# Altium PCB TSAL_Light.PcbDoc
Units mm, origin at the board's own origin, x right, y up, seen from the top; angles counter-clockwise.
Board outline 80.13 x 25.45 mm, 2 copper layers (Top Layer, Bottom Layer), stack 1.571 mm thick; 19 components, 16 nets, 54 pads, 59 vias.
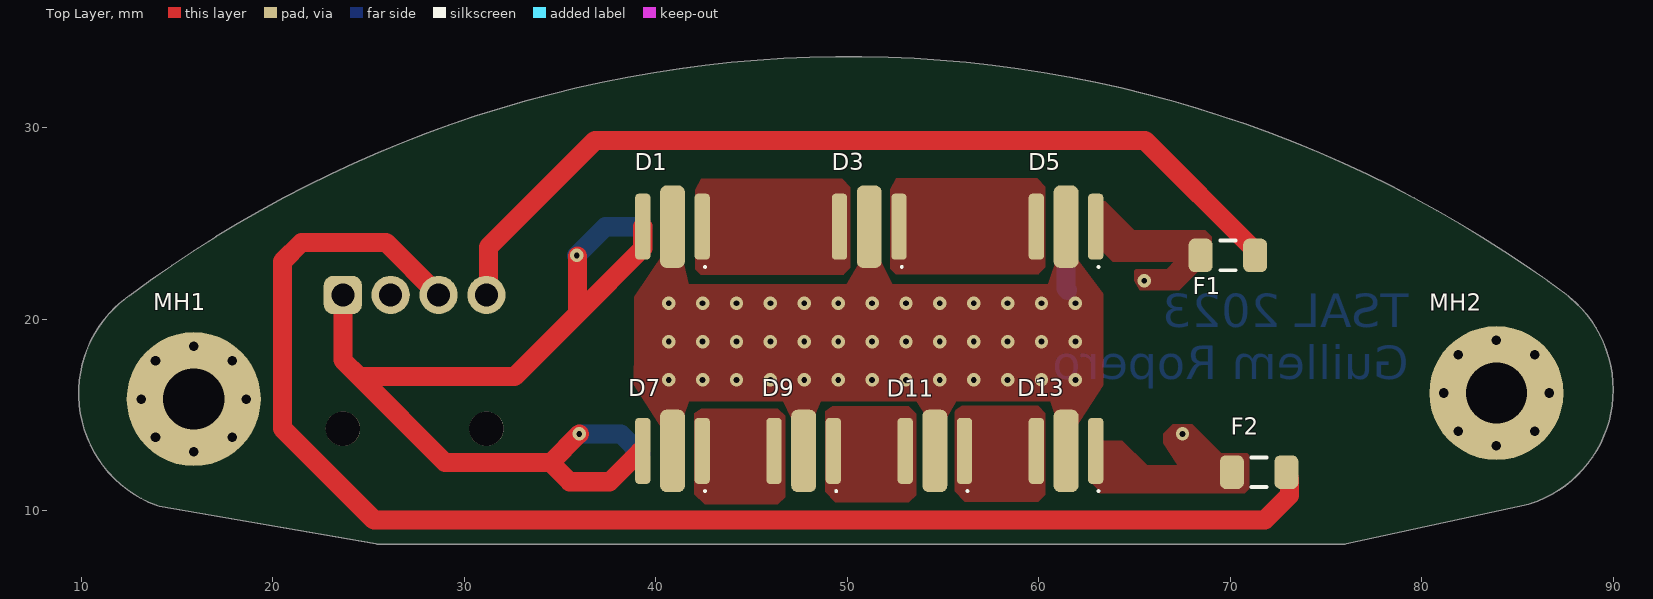
[diagram p0: Top Layer view]
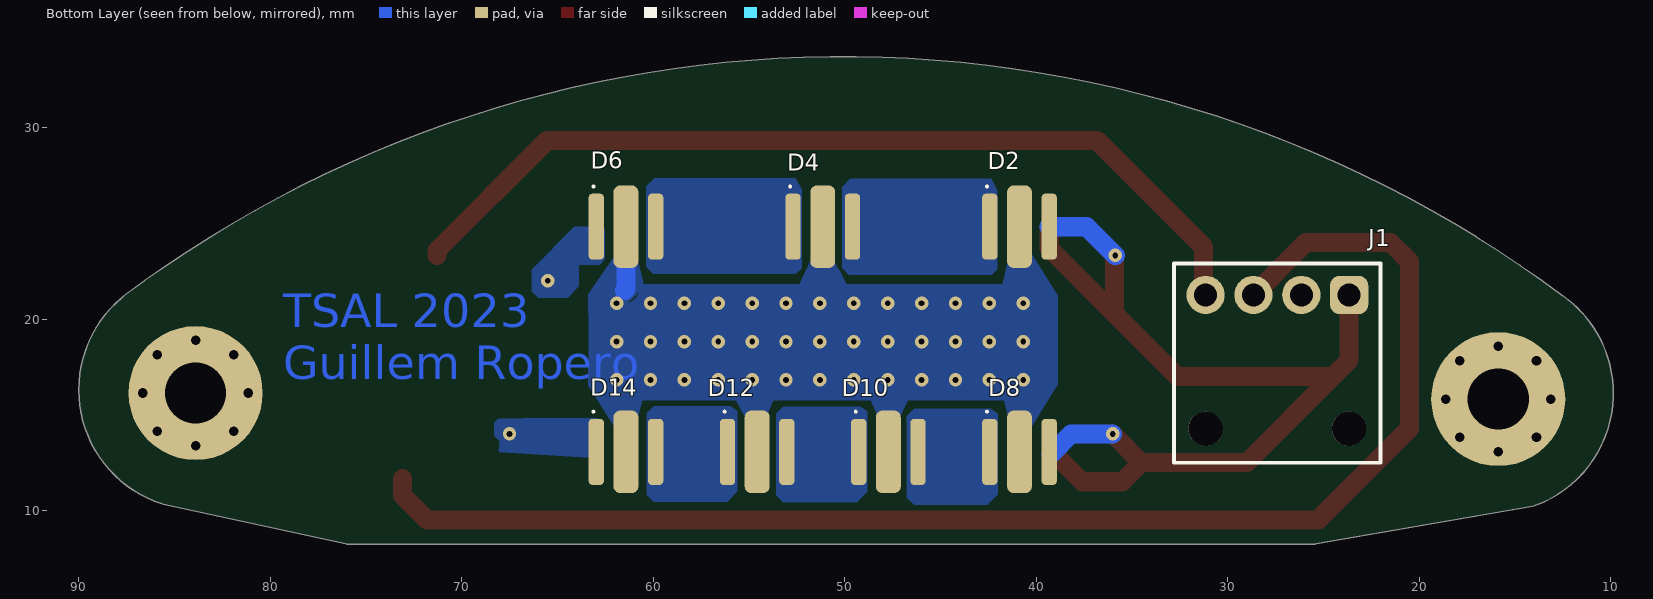
[diagram p1: Bottom Layer view, seen from below]

## Layer stack, top to bottom
Top Solder: solder mask 0.0102, Solder Resist, Dk 3.5
Top Layer: signal copper 0.0356
Dielectric 1: dielectric 1.5, FR-4, Dk 4.8
Bottom Layer: signal copper 0.0356
Bottom Solder: solder mask 0.0102, Solder Resist, Dk 3.5

## Board outline
14.068,10.222 25.383,8.253 25.426,8.25 76,8.25 76.053,8.255 85.582,10.326 85.652,10.353 ccw(c83.742,16.305) 89.992,16.305 ccw(c83.742,16.305) 87.713,21.131 87.65,21.201 ccw(c50.069,-29.052) 12.501,21.21 12.433,21.175 ccw(c16.106,16.118)

## Design rules (kind name [scope] priority, off if disabled: settings)
Clearance [All] p1: gap=0.2 ignorepadtopadclearanceinfootprint=FALSE
HoleSize [All] p1: absolutevalues=TRUE maxlimit=5 minlimit=0.15 maxpercent=80.000 minpercent=20.000
PlaneClearance [All] p1: clearance=0.5
PlaneConnect [All] p1: planeconnectstyle=Relief reliefexpansion=0.2 reliefentries=4 reliefconductorwidth=0.2 reliefairgap=0.5
PolygonConnect [All] p1: connectstyle=Direct reliefconductorwidth=0.2 reliefentries=4 polygonreliefangle="45 Angle" airgapwidth=0.5
RoomDefinition TSAL_Light [InComponentClass('TSAL_Light')] p1: confinementstyle=ConfineIn formatcopy=TRUE lockcomponents=FALSE outline 0,0 106,0 106,38.32 0,38.32
RoutingCorners [All] p1: cornerstyle=45-Degree minsetback=2.5 maxsetback=2.5
RoutingVias [All] p1: holewidth=0.3 width=0.7 viastyle="Through Hole" minholewidth=0.2 minwidth=0.5 maxholewidth=5 maxwidth=8
SilkToSolderMaskClearance [IsPad] p1: minsilkscreentomaskgap=0.25 clearancetoexposedcopper=TRUE
SolderMaskExpansion [All] p1: expansion=0.102 istentingtop=TRUE
UnRoutedNet [All] p1: checkbadconnections=TRUE
Width [All] p1: maxlimit=5 minlimit=0.2 preferedwidth=1
24 further rules are at their usual default settings.

## Components (designator, comment, footprint, x,y, rotation, side; value= is the part's Value field where it differs from the comment)
D1 "150353GS74500" LED_3535_WE 40.866,24.82 r180 top
D2 "150353GS74500" LED_3535_WE 40.866,24.82 r180 bottom
D3 "150353GS74500" LED_3535_WE 51.141,24.82 r180 top
D4 "150353GS74500" LED_3535_WE 51.141,24.82 r180 bottom
D5 "150353GS74500" LED_3535_WE 61.416,24.82 r180 top
D6 "150353GS74500" LED_3535_WE 61.416,24.82 r180 bottom
D7 "150353RS74500" LED_3535_WE 40.866,13.113 r180 top
D8 "150353RS74500" LED_3535_WE 40.866,13.063 r180 bottom
D9 "150353RS74500" LED_3535_WE 47.716,13.113 r180 top
D10 "150353RS74500" LED_3535_WE 47.716,13.063 r180 bottom
D11 "150353RS74500" LED_3535_WE 54.566,13.113 r180 top
D12 "150353RS74500" LED_3535_WE 54.566,13.063 r180 bottom
D13 "150353RS74500" LED_3535_WE 61.416,13.113 r180 top
D14 "150353RS74500" LED_3535_WE 61.416,13.063 r180 bottom
F1 "0437001.WRA" Fuse_1206 69.866,23.32 r180 top
F2 "0437001.WRA" Fuse_1206 71.5,12 r180 top
J1 "1053131204" J_NanoFit_1x4 27.4,17.763 r180 bottom
MH1 "Mounting_Hole_M3" Mounting_Hole_M3 15.866,15.82 r0 top
MH2 "Mounting_Hole_M3" Mounting_Hole_M3 83.89,16.135 r0 top

## Footprints (in the part's own frame and the unit in brackets; to place one, negate y for a bottom-side part, rotate by r counter-clockwise, add the part's x,y. Pads: shape width x height; smd on the part's side, far side on the other; paste and mask are expansions set on the pad)
Fuse_1206 [mm] "Chip Resistor, 2-Leads, Body 3,20x1,58mm, IPC Medium Density"
  rrect50% 1.25x1.75 smd: 1(-1.425,0) 2(1.425,0)
  silkscreen extent -0.4,-0.77 0.4,0.77, body extent -1.6,-0.79 1.6,0.79, height 0.86
J_NanoFit_1x4 [mm]
  rrect50% 2x2 hole 1.2: 1(3.75,3.492)
  round 2 hole 1.2: 2(1.25,3.492) 3(-1.25,3.492) 4(-3.75,3.493)
  round 1.8 hole 1.8: 5(-3.75,-3.492) 5(3.743,-3.493)
  silkscreen extent -5.4,-5.27 5.39,5.14, body extent -5.47,-8.35 5.47,3.81, height 6.35
LED_3535_WE [mm] "DFN, 2-Leads, Body 3,25x3,25mm, Pitch 2,28mm, IPC Medium Density"
  rrect50% 0.8x3.45 smd: A(1.55,0) K(-1.55,0)
  rrect50% 1.3x4.3 smd: T(0,0)
  silkscreen extent -1.75,2.05 -1.65,2.15, body extent -1.73,-1.73 1.73,1.73, height 0.25
Mounting_Hole_M3 [mm]
  round 7 hole 3.2: 1(0,0)

## Part data
D1 D2 D3 D4 D5 D6: library part LEDGS-3535-85, "High Brightness LED, WL-SMDC Series, 525 nm, Green, 85 lm, 350 mA", Case/Package=SMD/SMT, Color=Green, Forward Current=1A, Forward Voltage=3.4V, Manufacturer="Wurth Electronics", Supplier Part Number 1=732-10350-1-ND, Test Current=350mA, Test Temperature=25°C, Thermal Resistance of Package=8°C/W, .Creator=GP, ComponentLink1Description=http://www.farnell.com/datasheets/1886832.pdf?src-supplier=Farnell, ComponentLink1URL=http://www.farnell.com/datasheets/1886832.pdf?src-supplier=Farnell, ComponentLink2Description=http://www.farnell.com/datasheets/1886832.pdf?src-supplier=Element14, ComponentLink2URL=http://www.farnell.com/datasheets/1886832.pdf?src-supplier=Element14, ComponentLink3Description="Where buy it", ComponentLink3URL=https://www.we-online.com/catalog/en/WL-SMDC?sq=150353rs74500&sp=https%3A%2F%2Fwww.we-online.com%2Fweb%2Fen%2Fwuerth_elektronik%2Fsearchpage.php%3Fsearch%3D150353rs74500#150353GS74500, Luminous Flux=85lm, Manufacturer part number=150353GS74500, Max Current Rating=1A, Mount="Surface Mount", Packaging="Cut Tape", Pricing 1="1=3,24000, 50=2,85700, 100=2,34700, 500=2,08000 (USD)", REACH SVHC=Unknown, RoHS=Yes, RoHS Compliant=Yes, Supplier 1=Digi-Key, Viewing Angle=125°, Wavelength=525nm
D7 D8 D9 D10 D11 D12 D13 D14: library part LEDRS-3535-55, "High Brightness Led, Wl-Smdc Series, 625 Nm, Red, 55 Lm, 350 Ma", Case/Package=SMD/SMT, Color=Red, Forward Current=700mA, Forward Voltage=2.2V, Manufacturer="Wurth Electronics", Supplier Part Number 1=9008911, Test Current=350mA, Test Temperature=25°C, Thermal Resistance of Package=10°C/W, .Creator=GP, ComponentLink1Description=http://www.farnell.com/datasheets/1886833.pdf?src-supplier=Farnell, ComponentLink1URL=http://www.farnell.com/datasheets/1886833.pdf?src-supplier=Farnell, ComponentLink2Description=http://www.farnell.com/datasheets/1886833.pdf?src-supplier=Element14, ComponentLink2URL=http://www.farnell.com/datasheets/1886833.pdf?src-supplier=Element14, ComponentLink3Description="Where buy it", ComponentLink3URL=https://www.we-online.com/catalog/en/WL-SMDC?sq=150353rs74500&sp=https%3A%2F%2Fwww.we-online.com%2Fweb%2Fen%2Fwuerth_elektronik%2Fsearchpage.php%3Fsearch%3D150353rs74500#150353RS74500, Luminous Flux=55lm, Manufacturer part number=150353RS74500, Max Current Rating=700mA, Mount="Surface Mount", Packaging="Cut Tape", Pricing 1="5=1,40500 (USD)", REACH SVHC=Unknown, RoHS=Yes, RoHS Compliant=Yes, Stock 1=1, Supplier 1=RSComponents, Viewing Angle=125°, Wavelength=625nm
F1 F2: library part Fuse_1A_63V_1206, "Fuse Chip Fast Acting 1A 63V SMD Solder Pad 1206 Ceramic T/R Automotive", Case Code (Imperial)=1206, Case Code (Metric)=3216, Current Rating=1A, Manufacturer=Littelfuse, Max Operating Temperature=150°C, Min Operating Temperature=-55°C, Supplier Part Number 1=F10001CT-ND, Voltage Rating (AC)=63V, .Creator=DO, Approvals=CSA,cURus, Case/Package=1206, Category=Fuses, ComponentLink1Description=https://www.littelfuse.com/~/media/electronics/datasheets/fuses/littelfuse_fuse_437a_datasheet.pdf.pdf?src-supplier=Digi-Key, ComponentLink1URL=https://www.littelfuse.com/~/media/electronics/datasheets/fuses/littelfuse_fuse_437a_datasheet.pdf.pdf?src-supplier=Digi-Key, ComponentLink2Description="Where buy it", ComponentLink2URL=https://www.mouser.es/ProductDetail/Littelfuse/0437001WRA?qs=DXv0QSHKF4z9CJhPXjxR%252BA%3D%3D, Fuse Type="Board Mount (Cartridge Style Excluded)", Manufacturer part number=0437001.WRA, Mount="Surface Mount", Packaging="Tape and Reel", Pricing 1="1=1,52000, 5=1,47000, 10=1,37600, 50=1,13860, 100=0,94880, 250=0,92508, 500=0,78276, 1000=0,68788 (USD)", RoHS=Yes, Stock 1=5820, Supplier 1=Digi-Key, Voltage Rating (DC)=63V
J1: library part J_NanoFit_1x4, "Nano-Fit Right Angle Header; Through Hole; 2.50mm; Single Row; 4 Circuit; Gold Plated", Color=Black, Manufacturer=Molex, Manufacturer part number=105313-1204, Supplier Part Number 1=1225085, .Creator=DO, Category="Headers and Wire Housings", ComponentLink1Description=http://www.farnell.com/datasheets/2216599.pdf?src-supplier=Farnell, ComponentLink1URL=http://www.farnell.com/datasheets/2216599.pdf?src-supplier=Farnell, ComponentLink2Description=http://www.farnell.com/datasheets/2216599.pdf?src-supplier=Element14, ComponentLink2URL=http://www.farnell.com/datasheets/2216599.pdf?src-supplier=Element14, ComponentLink3Description=http://www.farnell.com/datasheets/2216599.pdf?src-supplier=Newark, ComponentLink3URL=http://www.farnell.com/datasheets/2216599.pdf?src-supplier=Newark, ComponentLink4Description=https://www.molex.com/pdm_docs/sd/1053131102_sd.pdf?src-supplier=Digi-Key, ComponentLink4URL=https://www.molex.com/pdm_docs/sd/1053131102_sd.pdf?src-supplier=Digi-Key, Contact Material=Brass, Contact Plating=Gold, Gender=Male, Mount="Through Hole", Number of Rows=1, Pricing 1="10=1,14100, 50=0,65100, 100=0,63400, 250=0,61700, 500=0,60100 (GBP)", REACH SVHC=Unknown, RoHS=Yes, RoHS Compliant=Yes, Stock 1=286, Supplier 1=RSComponents, Termination="Through Hole"

## Via types
v1: diameter 0.7, hole 0.3, Top Layer to Bottom Layer, tented both sides, 43 vias
v2: diameter 0.7, hole 0.5, Top Layer to Bottom Layer, tented both sides, 16 vias

## Nets (pads, with @x,y where several pads share a name; then routed paths per layer and width w, separated by ;. In a path a pad name is that pad's centre, name@x,y a point inside that pad or via, vN(x,y) a via of type N, cw(c..) or ccw(c..) an arc to the next point about the centre after c; other vN are vias at no path point)
+VCC: D1.A D2.A D7.A D8.A J1.1 | length 53.7
  Top Layer w1: J1.1 23.65,17.85 24.5,17 ; v1@35.901,23.285 35.901,20.281 ; v1(36,14) 34.5,12.5 ; D7.A@39.151,13.068 37.583,11.5 35.5,11.5 34.5,12.5 ; D1.A 39.316,23.695 35.901,20.281 ; 24.5,17 32.62,17 35.901,20.281 ; 24.5,17 29,12.5 34.5,12.5
  Bottom Layer w1: v1(35.866,23.32) 37.366,24.82 D2.A ; v1(36,14) 38.162,14 D8.A@39.213,12.948
Green_LEDs: F1.1 J1.4 | length 47.5
  Top Layer w1: J1.4 31.256,21.362 31.256,23.756 36.82,29.32 65.541,29.32 71.291,23.57 F1.1
NetD1_K: D1.K D3.A
NetD2_K: D2.K D4.A
NetD3_K: D3.K D5.A
NetD4_K: D4.K D6.A
NetD5_K: D5.K D6.K F1.2
  other v1: 65.5,22
NetD7_K: D7.K D9.A
NetD8_K: D8.K D10.A
NetD9_K: D9.K D11.A
NetD10_K: D10.K D12.A
NetD11_K: D11.K D13.A
NetD12_K: D12.K D14.A
NetD13_K: D13.K D14.K F2.2
  other v1: 67.5,14
Red_LEDs: F2.1 J1.3 | length 74.4
  Top Layer w1: J1.3 25.905,24 21.5,24 20.5,23 20.5,14.281 25.281,9.5 71.793,9.5 73.088,10.796 F2.1@73.088,11.669
Thermal_pad: D1.T D2.T D3.T D4.T D5.T D6.T D7.T D8.T D9.T D10.T D11.T D12.T D13.T D14.T | length 3.4
  Bottom Layer w1: D6.T 61.416,21.584 61.5,21.5
  other v1: 40.669,16.82 42.438,16.82 44.208,16.82 45.978,16.82 47.747,16.82 49.517,16.82 51.287,16.82 53.057,16.82 54.826,16.82 56.596,16.82 58.366,16.82 60.135,16.82 61.905,16.82 40.669,18.82 42.438,18.82 44.208,18.82 45.978,18.82 47.747,18.82 49.517,18.82 51.287,18.82 53.057,18.82 54.826,18.82 56.596,18.82 58.366,18.82 60.135,18.82 61.905,18.82 40.669,20.82 42.438,20.82 44.208,20.82 45.978,20.82 47.747,20.82 49.517,20.82 51.287,20.82 53.057,20.82 54.826,20.82 56.596,20.82 58.366,20.82 60.135,20.82 61.905,20.82
pads on no net: J1.2 J1.5 MH1.1 MH2.1
copper on no net:
  other v2: 15.866,13.07 83.89,13.385 13.866,13.82 17.866,13.82 81.89,14.135 85.89,14.135 13.116,15.82 18.616,15.82 81.14,16.135 86.64,16.135 13.866,17.82 17.866,17.82 81.89,18.135 85.89,18.135 15.866,18.57 83.89,18.885

## Polygon pours and split planes (outlines as drawn)
NetD11_K on Top Layer "NETD11_K_L01_P004" (solid, pour order 4): 55.597,15.211 55.597,10.999 56.138,10.459 59.969,10.459 60.343,10.834 60.343,15.08 59.964,15.459 55.964,15.459
NetD9_K on Top Layer "NETD9_K_L01_P003" (solid, pour order 3): 48.836,15.183 48.836,10.971 49.376,10.431 53.208,10.431 53.582,10.805 53.582,15.051 53.203,15.431 49.203,15.431
NetD7_K on Top Layer "NETD7_K_L01_P002" (solid, pour order 2): 41.999,15.073 41.999,10.86 42.539,10.32 46.371,10.32 46.745,10.695 46.745,14.941 46.366,15.32 42.366,15.32
NetD5_K on Top Layer "NETD5_K_L01_P030" (solid, pour order 30): 68.885,23.062 67.323,21.5 65.262,21.5 64.977,22.01 64.977,22.523 65.046,22.593 66.663,22.593 67.157,23.087
NetD5_K on Top Layer "NETD5_K_L01_P029" (solid, pour order 29): 69.026,24.003 69.026,24.307 68.695,24.638 64.987,24.638 63.464,26.161 63.451,26.148 62.669,26.148 62.669,25.79 62.669,25.552 62.669,25.367 62.669,24.162 63.848,22.983 63.861,22.996 68.5,22.996 69.009,22.983
NetD13_K on Top Layer "NETD13_K_L01_P028" (solid, pour order 28): 69.643,12.857 68,14.5 67,14.5 66.5,14 66.5,13.5 67.5,11.953 69.28,11.953
NetD13_K on Top Layer "NETD13_K_L01_P027" (solid, pour order 27): 62.606,12.979 63.09,13.464 63.09,13.647 64.361,13.647 65.648,12.36 68.808,12.36 69.426,12.979 70.88,12.979 70.981,12.878 70.981,11.123 70.747,10.889 63.157,10.889 63.157,11.023 62.606,11.575
Thermal_pad on Top Layer "THERMAL_PAD_L01_P007" (solid, pour order 7): 61.216,24 61.356,24 63.366,21.32 63.366,20.32 61.28,20.32 60.312,21.288
Thermal_pad on Top Layer "THERMAL_PAD_L01_P005" (solid, pour order 5): 38.866,20.32 40.366,21.82 61.866,21.82 63.366,20.32 63.366,16.766 62.316,15.716 39.784,15.716 38.866,16.634
Thermal_pad on Top Layer "THERMAL_PAD_L01_P009" (solid, pour order 9): 41.122,13.956 40.334,14.24 38.834,16.562 38.834,17.562 40.334,17.562 41.843,16.054
Thermal_pad on Top Layer "THERMAL_PAD_L01_P010" (solid, pour order 10): 48.075,14.435 48.27,14.892 48.855,16.265 48.874,16.441 48.855,16.441 48.503,16.793 48.464,16.753 46.626,16.753 46.626,16.656 46.333,16.362 47.131,14.717 47.466,14.465
Thermal_pad on Top Layer "THERMAL_PAD_L01_P011" (solid, pour order 11): 55.086,14.673 55.864,16.021 55.884,16.197 55.864,16.197 55.512,16.549 55.473,16.51 53.636,16.51 53.636,16.412 53.342,16.119 54.183,14.789 54.523,14.188
Thermal_pad on Top Layer "THERMAL_PAD_L01_P012" (solid, pour order 12): 61.124,14.151 61.867,14.244 63.367,16.55 63.367,17.55 61.867,17.55 60.46,16.143
Thermal_pad on Top Layer "THERMAL_PAD_L01_P008" (solid, pour order 8): 41.304,23.556 40.5,23.556 38.871,21.166 38.871,20.166 40.371,20.166 41.778,21.572
Thermal_pad on Top Layer "THERMAL_PAD_L01_P006" (solid, pour order 6): 50.69,23.063 49.922,21.742 49.903,21.566 49.922,21.566 50.274,21.214 50.313,21.253 52.151,21.253 52.151,21.351 52.444,21.644 51.603,23.266 51.207,23.437
NetD1_K on Top Layer "NETD1_K_L01_P000" (solid, pour order 0): 42.042,26.741 42.047,26.736 42.047,22.607 42.339,22.315 49.801,22.315 49.801,22.327 50.155,22.68 50.155,26.887 49.721,27.32 42.366,27.32
NetD3_K on Top Layer "NETD3_K_L01_P001" (solid, pour order 1): 52.227,26.765 52.231,26.76 52.231,22.631 52.524,22.339 59.985,22.339 59.985,22.351 60.339,22.704 60.339,26.911 59.906,27.344 52.55,27.344
NetD13_K on Bottom Layer "NETD13_K_L02_P033" (solid, pour order 33): 68.08,13.037 68,13.609 68.301,13.91 68.301,14.586 68.08,14.807 62.879,14.807 62.645,14.573 62.645,13.832 62.668,13.832 62.879,12.737
NetD5_K on Bottom Layer "NETD5_K_L02_P032" (solid, pour order 32): 62.568,24.789 62.599,24.82 64.108,24.82 66.349,22.579 66.349,21.443 66.006,21.101 65.991,21.116 64.466,21.116 63.875,21.708 63.875,22.844 62.785,22.844 62.521,23.108 62.521,24.649
Thermal_pad on Bottom Layer "THERMAL_PAD_L02_P017" (solid, pour order 17): 54.929,14.372 55.962,16.323 55.981,16.498 55.962,16.498 55.61,16.85 55.571,16.811 53.733,16.811 53.733,16.714 53.439,16.42 54.333,14.372 54.626,14.372
Thermal_pad on Bottom Layer "THERMAL_PAD_L02_P018" (solid, pour order 18): 48.13,14.657 48.885,16.368 48.905,16.544 48.885,16.544 48.533,16.896 48.494,16.857 46.657,16.857 46.657,16.759 46.363,16.465 47.235,14.657 47.366,14.657 47.692,13.666
Thermal_pad on Bottom Layer "THERMAL_PAD_L02_P019" (solid, pour order 19): 41.234,14.146 40.375,14.146 38.875,16.602 38.875,17.602 40.375,17.602 41.782,16.195
Thermal_pad on Bottom Layer "THERMAL_PAD_L02_P020" (solid, pour order 20): 61.008,14.091 61.769,13.99 63.379,16.546 63.379,17.546 61.879,17.546 60.472,16.14
NetD8_K on Bottom Layer "NETD8_K_L02_P023" (solid, pour order 23): 41.999,15.054 41.999,10.841 42.539,10.301 46.371,10.301 46.745,10.676 46.745,14.922 46.366,15.301 42.366,15.301
NetD10_K on Bottom Layer "NETD10_K_L02_P024" (solid, pour order 24): 48.826,15.182 48.826,10.969 49.366,10.429 53.197,10.429 53.572,10.804 53.572,15.05 53.192,15.429 49.192,15.429
NetD12_K on Bottom Layer "NETD12_K_L02_P025" (solid, pour order 25): 55.595,15.205 55.595,10.993 56.135,10.453 59.966,10.453 60.341,10.827 60.341,15.073 59.961,15.453 55.961,15.453
NetD4_K on Bottom Layer "NETD4_K_L02_P022" (solid, pour order 22): 52.242,26.779 52.247,26.774 52.247,22.646 52.54,22.353 60.001,22.353 60.001,22.365 60.355,22.719 60.355,26.925 59.921,27.359 52.566,27.359
NetD2_K on Bottom Layer "NETD2_K_L02_P021" (solid, pour order 21): 42.02,26.734 42.025,26.73 42.025,22.601 42.318,22.309 49.779,22.309 49.779,22.321 50.133,22.674 50.133,26.881 49.699,27.314 42.344,27.314
Thermal_pad on Bottom Layer "THERMAL_PAD_L02_P016" (solid, pour order 16): 50.711,23.341 49.89,21.776 49.87,21.6 49.89,21.6 50.242,21.249 50.281,21.288 52.119,21.288 52.119,21.385 52.412,21.679 51.63,23.341 51.238,23.341
Thermal_pad on Bottom Layer "THERMAL_PAD_L02_P015" (solid, pour order 15): 60.917,23.478 61.5,24 63.377,21.288 63.377,20.288 61.877,20.288 60.47,21.694
Thermal_pad on Bottom Layer "THERMAL_PAD_L02_P014" (solid, pour order 14): 41.329,23.655 40.377,23.655 38.877,21.202 38.877,20.202 40.377,20.202 41.784,21.609
Thermal_pad on Bottom Layer "THERMAL_PAD_L02_P013" (solid, pour order 13): 38.866,20.32 40.366,21.82 61.866,21.82 63.366,20.32 63.366,16.866 62.255,15.755 39.745,15.755 38.866,16.634

## Other copper
Bottom Layer:
  text "TSAL 2023" at 79.304,19 h3
  text "Guillem Ropero" at 79.304,16.269 h3

## Silkscreen, mask and mechanical layers (free items; w line width, h text height)
Mechanical 1:
  lines w0.5: 12.58,20.973 ccw(c16.106,16.118) 14,10.5 ; 12.638,21 cw(c50.069,-29.052) 87.5,21 ; 14.11,10.47 14.11,10.469 25.426,8.5 76,8.5 85.528,10.571 ; 20.866,26.216 20.867,26.215 ; 85.481,10.562 ccw(c83.742,16.305) 87.436,21.033